# EAGLE board SACS PCB Wiring Schematic (EAGLE 9.7.0)
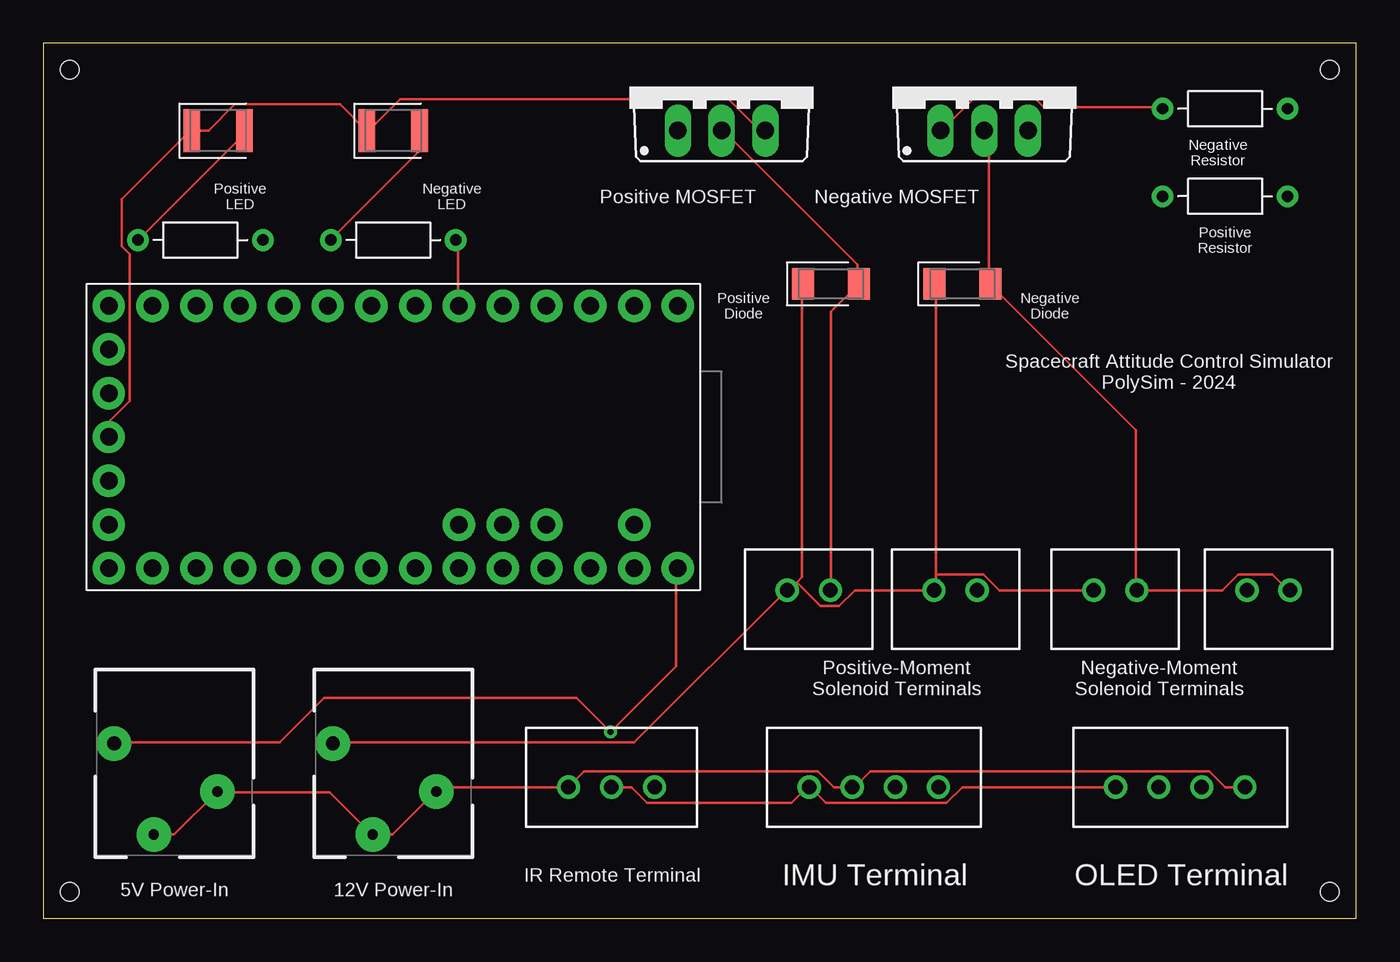
[diagram p0: board, top side]
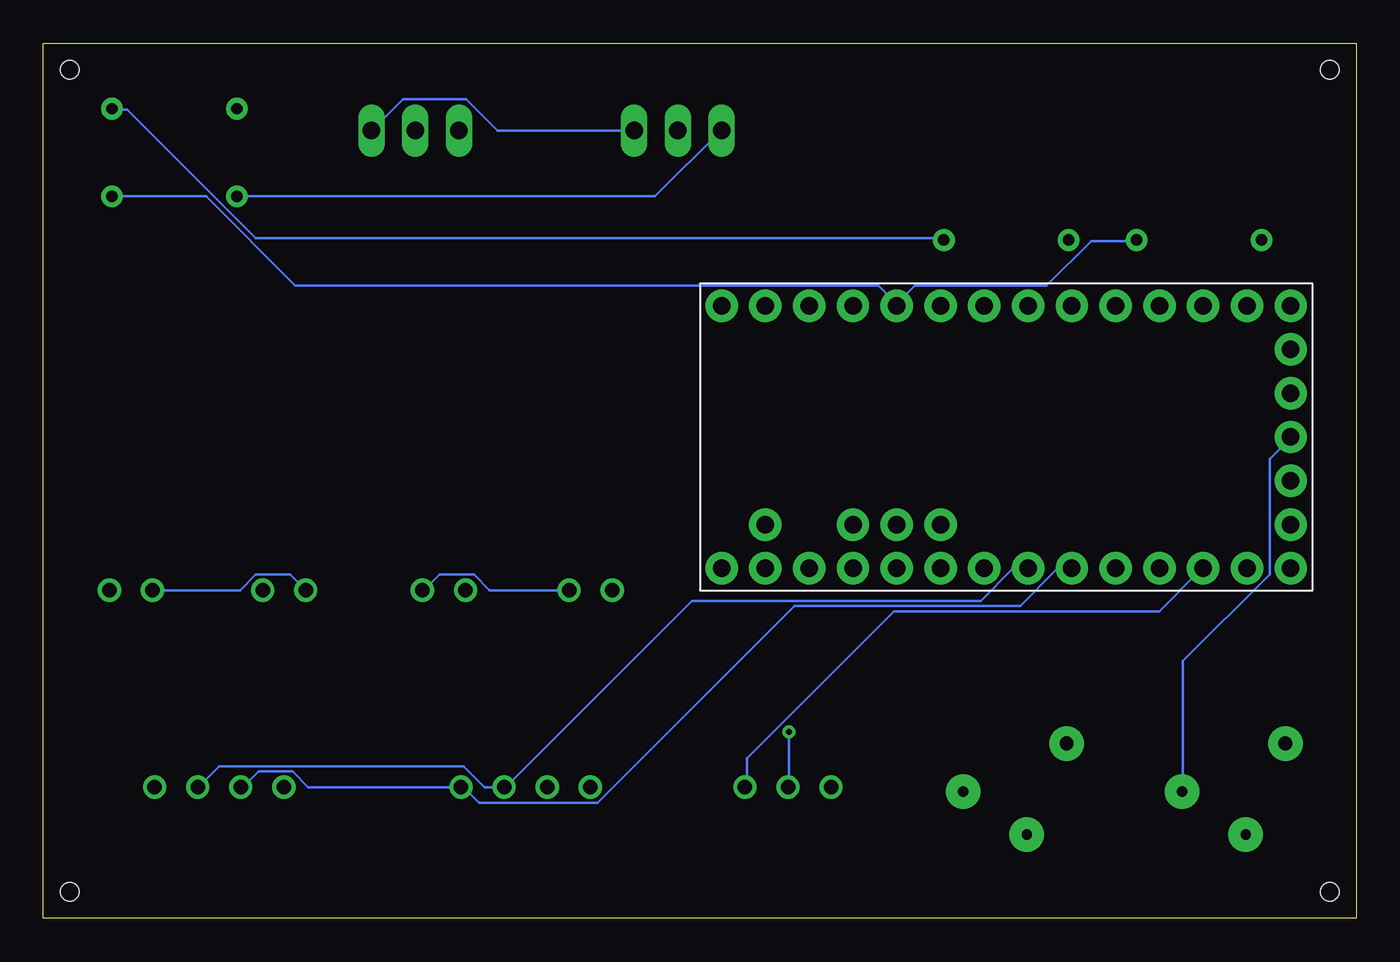
[diagram p1: board, bottom side, seen from below]

Size 76.2 x 50.8 mm. Coordinates in mm from the lower left corner, seen from the top.
Outline: 0,0 76.2,0 76.2,50.8 0,50.8 0,0
Copper layers (1*16): Top / Bottom
Stack-up Default Layer Stack: Top User Defined 0.035mm / Dielectric-1 User Defined 1.5mm / Bottom User Defined 0.035mm
Design rules: minimum drill size 0.35mm, minimum copper width 6mil, keepout clearance 0mil, drill distance 6mil, via restrict clearance 0mil, dimension clearance 40mil, restrict clearance 0mil, copper clearance wire_polygon to wire_polygon 6mil, copper clearance wire_polygon to pad_smd 6mil, copper clearance wire_polygon to via 6mil, copper clearance pad_smd to pad_smd 6mil, copper clearance pad_smd to via 6mil, copper clearance via to via 6mil, copper clearance smd to pad (same net) 6mil, copper clearance smd to via (same net) 6mil, copper clearance smd to smd (same net) 6mil
Holes 1.05 mm at 1.54,49.26 1.54,1.54 74.66,1.54 74.66,49.26

## Footprints (pad centres in the part's own frame; a part is rotated, then mirrored left to right if it is on the bottom)
TEENSY_NOSILK = drill 1.016 pad 1.88: 0 7.62,-13.97; 1 7.62,-11.43; 2 7.62,-8.89; 3 7.62,-6.35; 3.3V 2.54,16.51; 3V -7.62,-11.43; 4 7.62,-3.81; 5 7.62,-1.27; 6 7.62,1.27; 7 7.62,3.81; 8 7.62,6.35; 9 7.62,8.89; 10 7.62,11.43; 11 7.62,13.97; 12 7.62,16.51; 13 -7.62,16.51; 14 -7.62,13.97; 15 -7.62,11.43; 16 -7.62,8.89; 17 -7.62,6.35; 18 -7.62,3.81; 19 -7.62,1.27; 20 -7.62,-1.27; 21 -7.62,-3.81; 22 -7.62,-6.35; 23 -7.62,-8.89; A10 -5.08,-6.35; A11 -5.08,-3.81; A14/DAC -5.08,16.51; AGND -7.62,-13.97; AREF -5.08,-8.89; GND 0,16.51; GND1 7.62,-16.51; PROG -2.54,16.51; VBAT 5.08,16.51; VIN -7.62,-16.51; VUSB -5.08,-13.97
LEDC3224X250N_RND-B = smd 0.962 x 2.512: A 1.525,0; C -1.525,0
LEDC3224X250N_RND-R = smd 0.962 x 2.512: A 1.525,0; C -1.525,0
DIOMELF3516 = smd 1.275 x 1.85: 1 -1.62,0; 2 1.62,0
694106402002 = drill 0.8 pad 2 slot 3.5 rotated 90: 1 -3.5,0 | drill 0.6 pad 2 slot 2.8: 2 -1.2,-5.3; 3 2.5,-2.8
B2B-XH-A = drill 0.84: 1 0,0; 2 2.5,0
B3B-XH-A = drill 0.84: 1 0,0; 2 2.5,0; 3 5,0
B4B-XH-A = drill 0.84: 1 0,0; 2 2.5,0; 3 5,0; 4 7.5,0
TO220BV = drill 1.016 long: D 0,-2.54; G -2.54,-2.54; S 2.54,-2.54
RESAD724W46L381D178B = drill 0.66 pad 1.26: 1 -3.62,0; 2 3.62,0

## Placement (x,y rotation side)
B1  TEENSYNOSILK  [TEENSY_NOSILK]  20.32,27.94 90 top
D1  LED_BLUE  [LEDC3224X250N_RND-B]  10.16,45.72 0 top
D2  LED_RED  [LEDC3224X250N_RND-R]  20.32,45.72 0 top
D3  DIODE  [DIOMELF3516]  45.72,36.83 0 top
D4  DIODE  [DIOMELF3516]  53.34,36.83 0 top
J1  DC-JACK  [694106402002]  7.62,10.16 0 top
J2  DC-JACK  [694106402002]  20.32,10.16 0 top
J3  JST-XH-2PIN  [B2B-XH-A]  51.69,19.05 0 top
J4  JST-XH-2PIN  [B2B-XH-A]  43.18,19.05 0 top
J5  JST-XH-2PIN  [B2B-XH-A]  69.85,19.05 0 top
J6  JST-XH-2PIN  [B2B-XH-A]  60.96,19.05 0 top
J9  JST-XH-3PIN  [B3B-XH-A]  30.48,7.62 0 top
J10  JST-XH-4PIN  [B4B-XH-A]  44.45,7.62 0 top
J11  JST-XH-4PIN  [B4B-XH-A]  62.23,7.62 0 top
Q1  NMOSFET  [TO220BV]  39.37,48.26 0 top
Q2  NMOSFET  [TO220BV]  54.61,48.26 0 top
R1  [RESAD724W46L381D178B]  20.32,39.37 0 top
R2  [RESAD724W46L381D178B]  9.13,39.37 0 top
R3  [RESAD724W46L381D178B]  68.58,41.91 0 top
R4  [RESAD724W46L381D178B]  68.58,46.99 0 top

## Library data of the parts
B1 = SparkFun-Boards; SF_ID: DEV-12646
D1 = LED; CATEGORY: LED; COLOR: BLUE; DESCRIPTION: CHIP LED ROUND; SUB-CATEGORY: CHIP; TYPE: ROUND_TOP
D2 = LED; CATEGORY: LED; COLOR: RED; DESCRIPTION: CHIP LED ROUND; SUB-CATEGORY: CHIP; TYPE: ROUND_TOP
D3 D4 = Diode; CATEGORY: Diode; SUB-CATEGORY: Rectifier
J1 J2 = Connector; CATEGORY: DC Power Connectors; DESCRIPTION: DC POWER JACK - VERTICAL - THT - 2.0 & 2.5Ø - WR-DC; MANUFACTURER: Würth Elektronik; MPN: 694106402002; OPERATING_TEMPERATURE: -40°C to +85°C; PART_STATUS: Active; PITCH: value; ROHS_COMPLIANCE: RoHS3 Compliant; SERIES: WR-DC; SUBCATEGORY: Power Connectors; TYPE: Jack Male, Through Hole
J3-J6 = Connector; CATEGORY: Header; DESCRIPTION: Connector Header Through Hole 2 position 0.098" (2.50mm); MANUFACTURER: JST Sales America Inc.; MPN: B2B-XH-A(LF)(SN); OPERATING_TEMPERATURE: -25°C ~ 85°C; PART_STATUS: ACTIVE; PITCH: 0.098" (2.50mm); ROHS_COMPLIANCE: ROHS3 Compliant; SERIES: XH; SUB_CATEGORY: Rectangular Connectors; TYPE: Header, Male Pin, Board to Cable/Wire, Through Hole
J9 = Connector; CATEGORY: Header; DESCRIPTION: Connector Header Through Hole 3 position 0.098" (2.50mm); MANUFACTURER: JST Sales America Inc.; MPN: B3B-XH-A(LF)(SN); PART_STATUS: ACTIVE; PITCH: 0.098" (2.50mm); ROHS_COMPLIANCE: ROHS3 Compliant; SERIES: XH; SUB_CATEGORY: Rectangular Connectors; TYPE: Header, Male Pin, Board to Cable/Wire, Through Hole
J10 J11 = Connector; CATEGORY: Header; DSECRIPTION: Connector Header Through Hole 4 position 0.098" (2.50mm); MANUFACTURER: JST Sales America Inc.; MPN: B4B-XH-A(LF)(SN); OPERATING_TEMPERATURE: -25 C to 85 C; PART_STATUS: ACTIVE; PITCH: 0.098" (2.50mm); ROHS_COMPLIANCE: ROHS3 Compliant; SERIES: XH; SUB_CATEGORY: Rectangular Connectors; TYPE: Header, Male Pin, Board to Cable/Wire, Through Hole
Q1 Q2 = Transistor; CATEGORY: Transistor; SUB-CATEGORY: MOSFET; TYPE: N-Channel
R1-R4 = Resistor; CATEGORY: Resistor; SUB-CATEGORY: Fixed

## Nets
2: B1.2
3.3V: B1.3.3V
3V: B1.3V
5: B1.5
6: B1.6
12V: D3.1 D4.1 J2.1 J3.1 J4.1 J5.1 J6.1
A0: B1.14
A2: B1.16
A3: B1.17
A6: B1.20
A7: B1.21
A8: B1.22
A9: B1.23
A10: B1.A10
A11: B1.A11
AGND: B1.AGND
AREF: B1.AREF
DAC: B1.A14/DAC
DIN: B1.12
DOUT: B1.11
GND: B1.GND D1.C D2.C J1.2 J1.3 J2.2 J2.3 J9.1 J10.2 J11.4 Q1.S Q2.S
GND1: B1.GND1
IR_RECEIVER: B1.15 J9.3
N$1: D1.A R2.1
N$2: D2.A R1.1
N$3: Q2.G R4.1
N$4: Q1.G R3.1
N$5: D3.2 J3.2 J4.2 Q1.D
N$6: D4.2 J5.2 J6.2 Q2.D
RX: B1.0
RX2: B1.9
RX3: B1.7
SCK: B1.13
SCL: B1.19 J10.3 J11.3
SDA: B1.18 J10.4 J11.2
SOLENOID_N: B1.4 R1.2 R4.2
SOLENOID_P: B1.3 R2.2 R3.2
TX: B1.1
TX2: B1.10
TX3: B1.8
VBAT: B1.VBAT
VIN: B1.VIN J1.1 J9.2 J10.1 J11.1
VUSB: B1.VUSB

## Tracks (layer width: path | path; a pad name or v marks a point on that pad's centre or on a via)
12V
  Top 0.152: 51.82,19.96 51.82,19.05 J3.1 47.09,19.05 46.18,18.14 45.11,18.14 43.74,19.51 | 51.82,19.96 51.82,36.73 D4.1 | J6.1 55.47,19.05 54.56,19.96 51.82,19.96 | 43.74,19.51 43.28,19.05 J4.1 43.13,19.05 34.29,10.21 16.92,10.21 J2.1 | 43.74,19.51 44.04,19.81 44.04,36.73 D3.1
  Bottom 0.152: J5.1 64.77,19.05 63.86,19.96 61.87,19.96 J6.1
GND
  Top 0.152: J1.2 6.55,4.88 7.62,4.88 10.06,7.32 J1.3 10.21,7.32 16.61,7.32 19.05,4.88 J2.2 19.2,4.88 20.27,4.88 22.71,7.32 J2.3 22.86,7.47 23.01,7.62 J9.1 31.39,8.53 44.96,8.53 45.87,7.62 J10.2 47.09,7.62 48.01,8.53 67.67,8.53 68.58,7.62 J11.4 | B1.GND 3.81,28.8 5.03,30.02 5.03,38.56 4.57,39.01 4.57,41.76 8.53,45.72 D1.C 9.6,45.72 11.12,47.24 17.22,47.24 18.75,45.72 D2.C 18.9,45.72 20.73,47.55 39.78,47.55 41.6,45.72 Q1.S
  Bottom 0.152: Q1.S 49.84,45.72 51.66,47.55 55.32,47.55 Q2.S | J1.3 10.06,7.47 10.06,14.94 5.03,19.96 5.03,26.67 3.81,27.89 B1.GND
IR_RECEIVER
  Bottom 0.152: J9.3 35.36,7.62 35.36,9.3 26.82,17.83 11.43,17.83 8.99,20.27 B1.15
N$1
  Top 0.152: D1.A 11.58,45.72 11.58,45.41 5.64,39.47 R2.1
N$2
  Top 0.152: D2.A 21.79,45.72 21.79,44.5 16.76,39.47 R1.1
N$3
  Top 0.152: R4.1 64.92,47.09 58.06,47.09 57.61,47.55 53.95,47.55 52.12,45.72 Q2.G
N$4
  Bottom 0.152: R3.1 40.69,41.91 36.88,45.72 Q1.G
N$5
  Top 0.152: Q1.D 39.47,45.72 47.24,37.95 47.24,36.88 D3.2 47.24,36.73 45.72,35.2 45.72,19.05 J4.2
  Bottom 0.152: J4.2 50.29,19.05 51.21,19.96 53.19,19.96 54.1,19.05 J3.2
N$6
  Top 0.152: J5.2 72.24,19.05 71.32,19.96 69.34,19.96 68.43,19.05 J6.2 63.4,19.05 63.4,28.35 55.02,36.73 D4.2 54.86,36.88 54.86,45.57 54.71,45.72 Q2.D
SCL
  Bottom 0.152: J11.3 67.21,7.62 65.99,8.84 51.82,8.84 50.6,7.62 J10.3 49.38,7.62 38.56,18.44 21.79,18.44 19.96,20.27 19.05,20.27 B1.19
SDA
  Bottom 0.152: J11.2 64.62,7.62 63.7,8.53 61.72,8.53 60.81,7.62 J10.4 51.82,7.62 50.9,6.71 44.04,6.71 32.61,18.14 19.51,18.14 17.37,20.27 16.61,20.27 B1.18
SOLENOID_N
  Top 0.152: R1.2 24.08,39.32 24.08,35.66 B1.4
  Bottom 0.152: R4.2 72.08,46.94 71.32,46.94 63.86,39.47 24.08,39.47 R1.2
SOLENOID_P
  Bottom 0.152: 26.67,35.66 25.6,36.73 17.98,36.73 15.39,39.32 12.8,39.32 R2.2 | R3.2 66.75,41.91 61.57,36.73 27.74,36.73 26.67,35.66 | 26.67,35.66 B1.3
VIN  (via drill 0.35)
  Top 0.152: J9.2 34.14,7.62 35.05,6.71 43.43,6.71 44.35,7.62 J10.1 44.5,7.62 45.41,6.71 52.43,6.71 53.34,7.62 J11.1 | B1.VIN 36.73,20.27 36.73,14.63 v32.92,10.82 30.94,12.8 16.31,12.8 13.72,10.21 4.27,10.21 J1.1
  Bottom 0.152: v32.92,10.82 32.92,7.62 J9.2

## Text on the board
SilkscreenTop: Negative / Resistor | Positive / LED | Negative / LED | Positive MOSFET | Negative MOSFET | Positive / Resistor | Positive / Diode | Negative / Diode | Spacecraft Attitude Control Simulator / PolySim - 2024 | Positive-Moment / Solenoid Terminals | Negative-Moment / Solenoid Terminals | IR Remote Terminal | IMU Terminal | OLED Terminal | 5V Power-In | 12V Power-In